# EAGLE board Main Board - Double-Panel (EAGLE 9.6.2), part 1 of 2
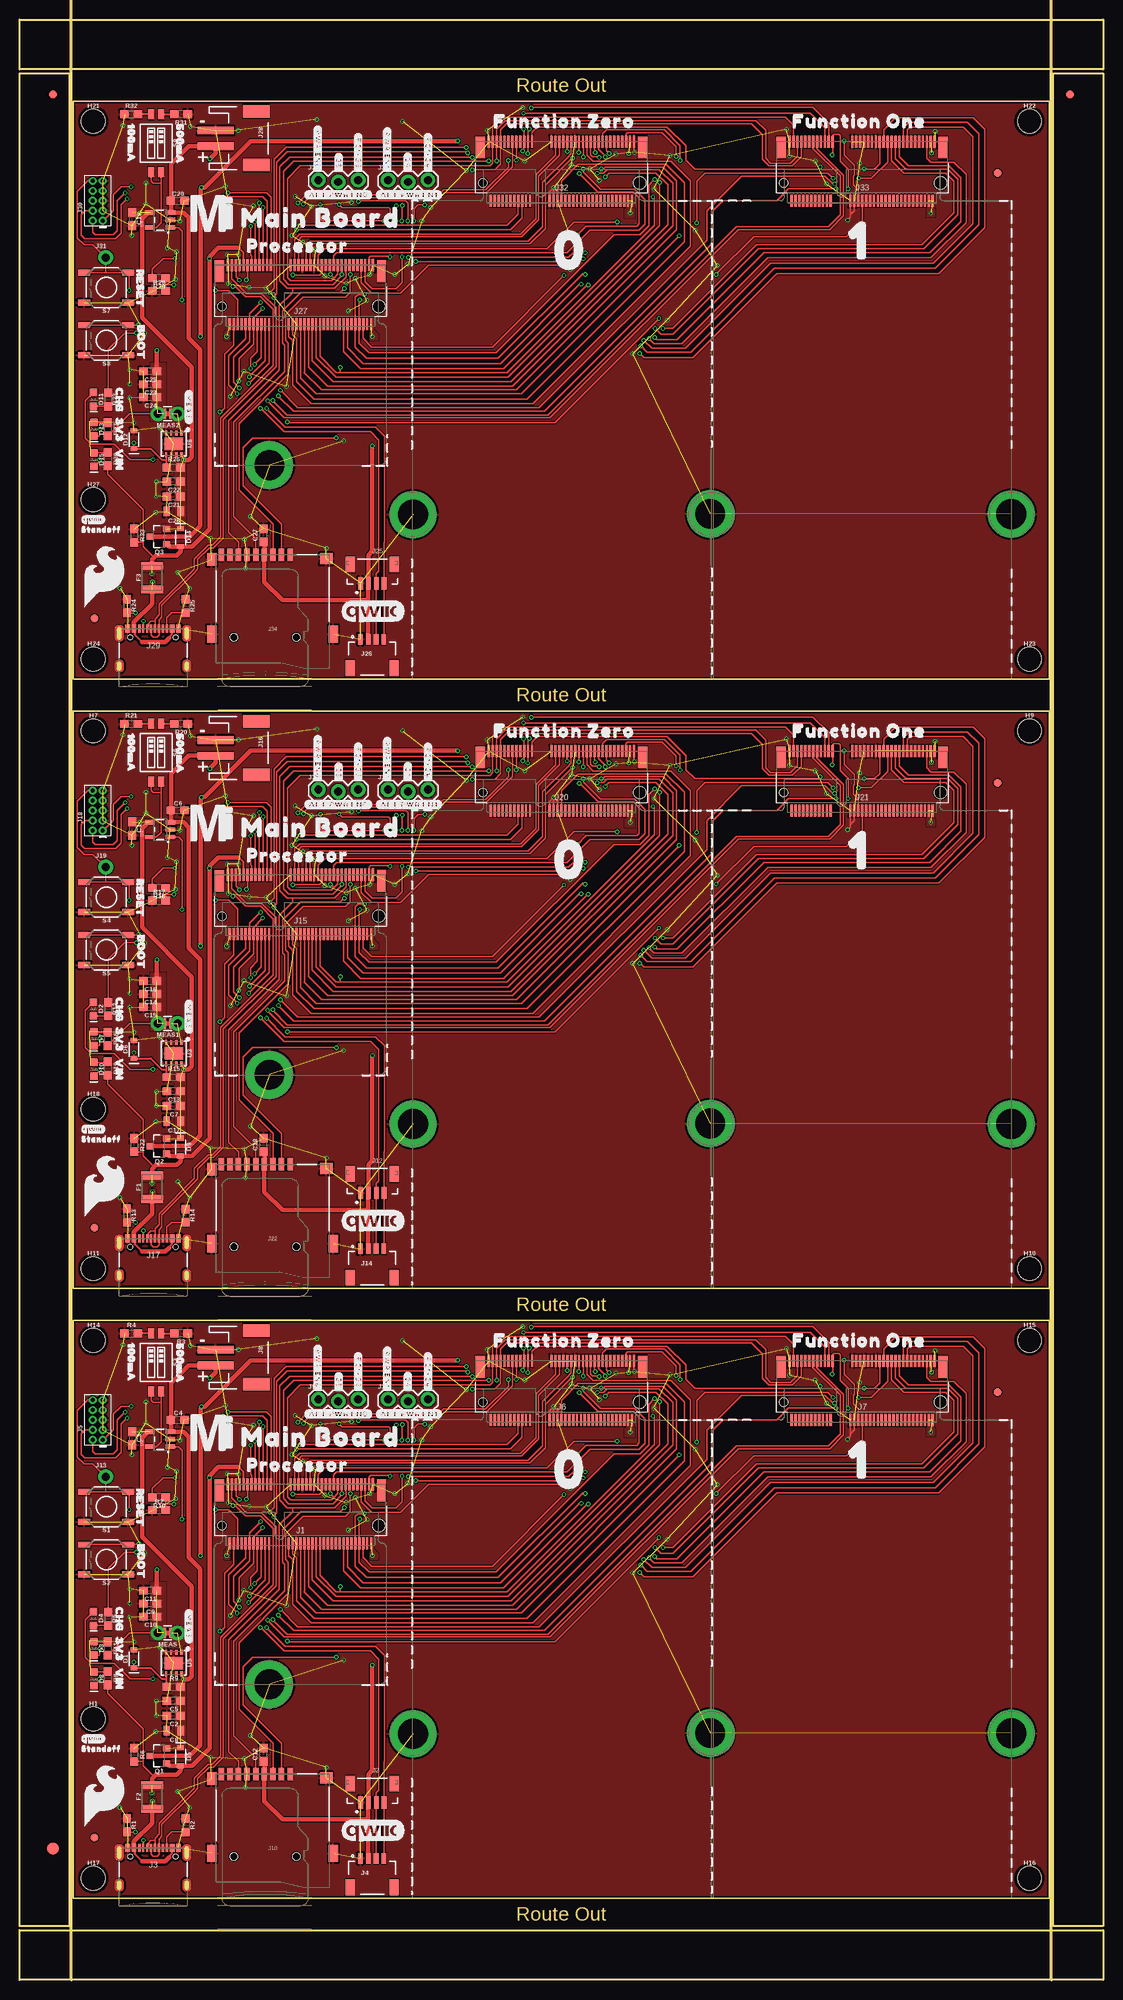
[diagram p0: board, top side]
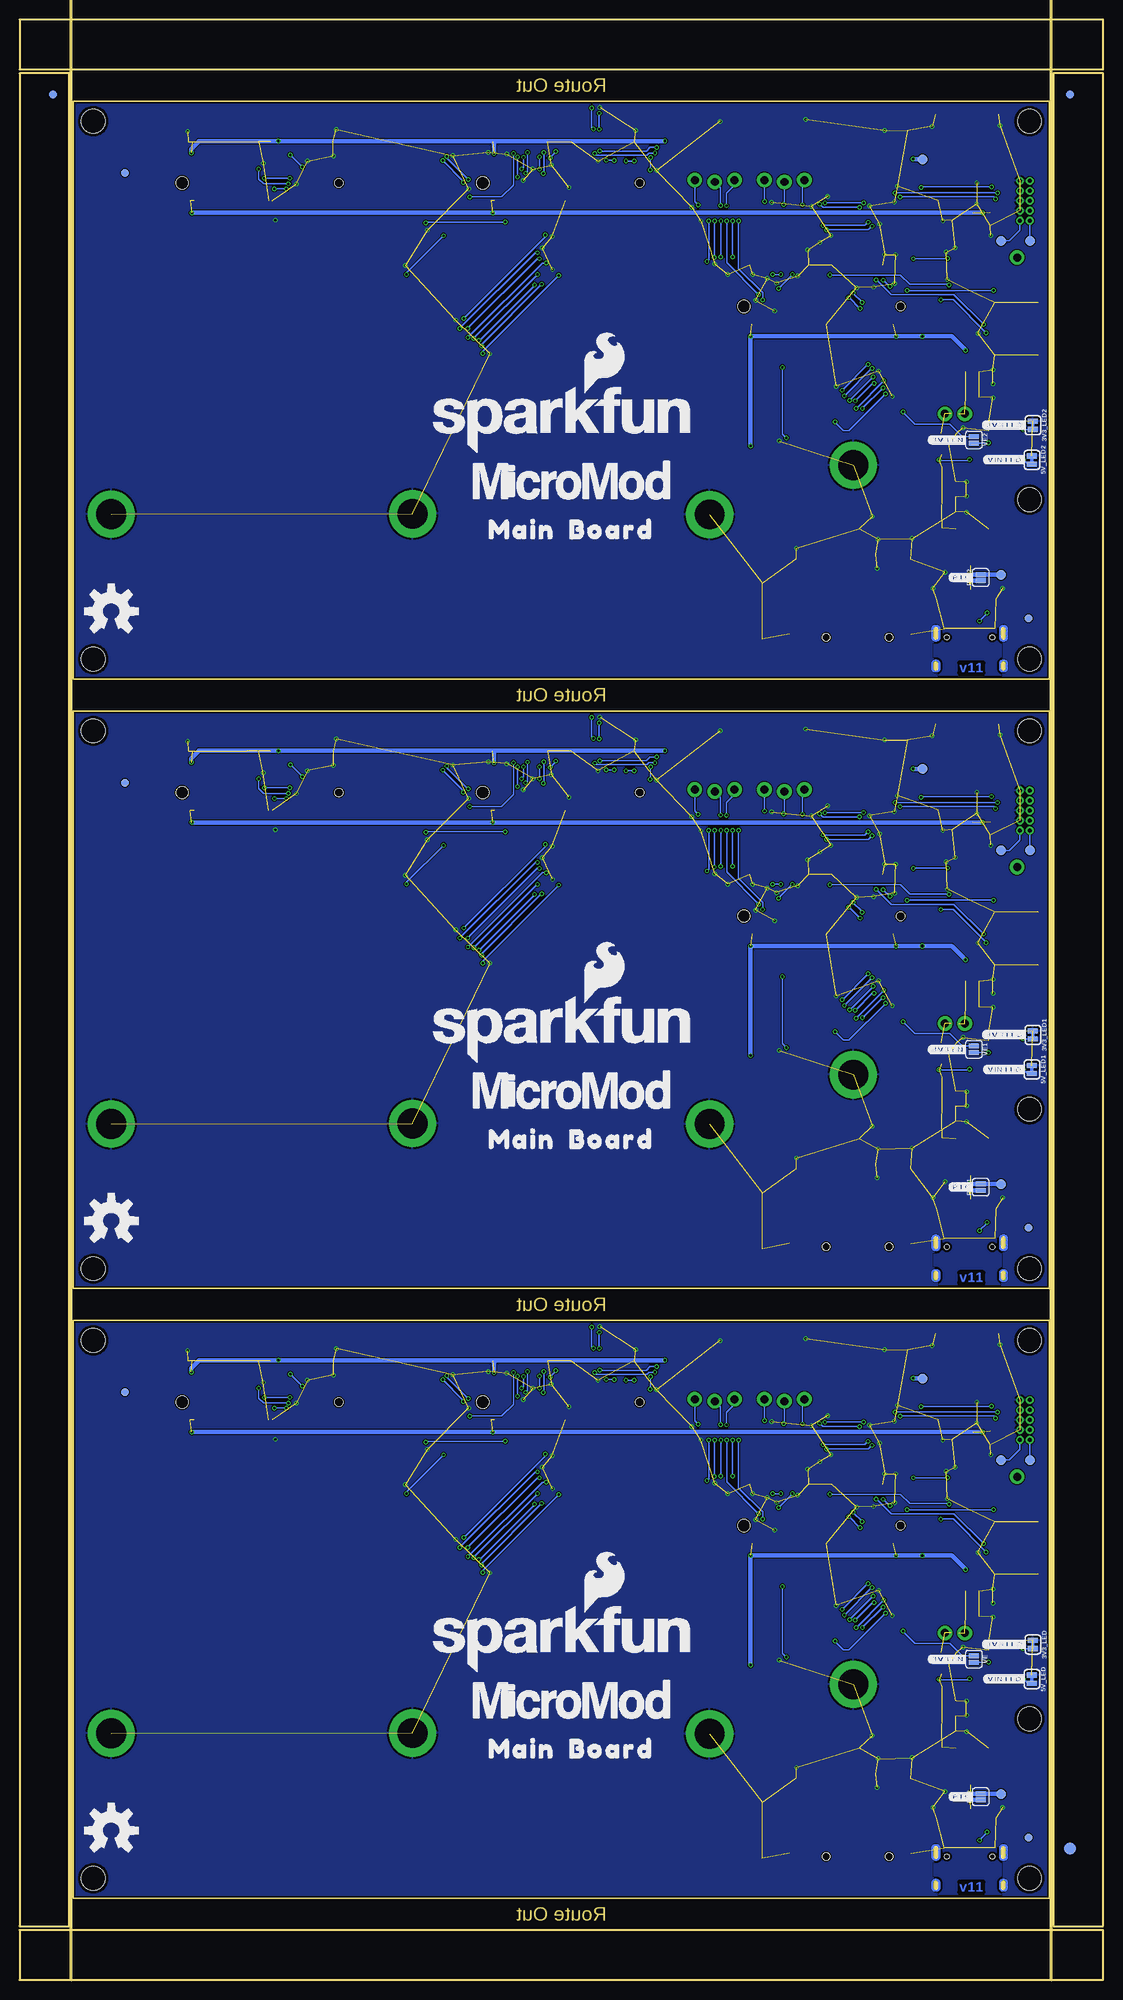
[diagram p1: board, bottom side, seen from below]

Size 138.18 x 249.94 mm. Coordinates in mm from the lower left corner, seen from the top.
Outline: 131.32,10.41 6.86,10.41 6.86,84.07 131.32,84.07 131.32,10.41
Outline: 131.32,88.14 6.86,88.14 6.86,161.8 131.32,161.8 131.32,88.14
Outline: 131.32,165.86 6.86,165.86 6.86,239.52 131.32,239.52 131.32,165.86
Outline: 0,6.35 138.18,6.35 138.18,0 0,0 0,6.35
Outline: 131.83,243.08 138.18,243.08 138.18,6.86 131.83,6.86 131.83,243.08
Outline: 0,249.94 138.18,249.94 138.18,243.59 0,243.59 0,249.94
Outline: 0,243.08 6.35,243.08 6.35,6.86 0,6.86 0,243.08
Copper layers (1*16): Top 0.035mm / dielectric 1.5mm / Bottom 0.035mm
Design rules "Main Board - Double": minimum track width 5mil, minimum drill 0.3mm, track to track 5mil, track to pad 5mil, pad to pad 5mil, via to via 5mil, smd to smd 5mil, copper to edge 7mil, drill to drill 7mil, minimum pad ring 5mil, minimum via ring 5mil, stop-mask expansion 2.5mil, vias tented up to drill 25mil, thermal gap 10mil
Net classes: 0 default: width 0.178 mm, drill 0.305 mm; 1 POWER: width 0.559 mm, drill 0.305 mm; 2 Diff pairs: width 0.203 mm, drill 0.305 mm
tRestrict: area 106.1,71.2 to 106.2,71.6; area 105.6,71.2 to 105.7,71.6; area 68.3,71.2 to 68.4,71.6; area 67.8,71.2 to 67.9,71.6; area 106.1,148.9 to 106.2,149.3; area 105.6,148.9 to 105.7,149.3; area 68.3,148.9 to 68.4,149.3; area 67.8,148.9 to 67.9,149.3; area 106.1,226.6 to 106.2,227; area 105.6,226.6 to 105.7,227; area 68.3,226.6 to 68.4,227; area 67.8,226.6 to 67.9,227
Milling: 2 lines

## Footprints (pad centres in the part's own frame; a part is rotated, then mirrored left to right if it is on the bottom)
SMT-JUMPER_2_NC_TRACE_SILK = smd 0.66 x 1.27: 1 -0.521,0; 2 0.521,0
SMT-JUMPER_2_NO_SILK = smd 0.635 x 1.27: 1 -0.406,0; 2 0.406,0
0603 = smd 1.1 x 1: 1 -0.85,0; 2 0.85,0
0805 = smd 0.8 x 1.2: 1 -0.9,0; 2 0.9,0
SOD-323 = smd 0.63 x 0.83: A 1.15,0; C -1.15,0
LED-0603 = smd 1 x 1: A -0.877,0; C 0.877,0
FIDUCIAL-1X2 = smd 1 x 1: 1 0,0
FIDUCIAL-1.5X3 = smd 1.5 x 1.5: 1 0,0
1210 = smd 1 x 2.8: 1 -1.5,0; 2 1.5,0
STAND-OFF-TIGHT = hole 3.048: 0,0
STAND-OFF-REFLOW-M2.5 = drill 3.8 pad 6: 1 0,0
M.2-CONNECTOR-E = smd 0.3 x 1.55: 1 9.25,-5.275; 2 9,2.275; 3 8.75,-5.275; 4 8.5,2.275; 5 8.25,-5.275; 6 8,2.275; 7 7.75,-5.275; 8 7.5,2.275; 9 7.25,-5.275; 10 7,2.275; 11 6.75,-5.275; 12 6.5,2.275; 13 6.25,-5.275; 14 6,2.275; 15 5.75,-5.275; 16 5.5,2.275; 17 5.25,-5.275; 18 5,2.275; 19 4.75,-5.275; 20 4.5,2.275; 21 4.25,-5.275; 22 4,2.275; 23 3.75,-5.275; 32 1.5,2.275; 33 1.25,-5.275; 34 1,2.275; 35 0.75,-5.275; 36 0.5,2.275; 37 0.25,-5.275; 38 0,2.275; 39 -0.25,-5.275; 40 -0.5,2.275; 41 -0.75,-5.275; 42 -1,2.275; 43 -1.25,-5.275; 44 -1.5,2.275; 45 -1.75,-5.275; 46 -2,2.275; 47 -2.25,-5.275; 48 -2.5,2.275; 49 -2.75,-5.275; 50 -3,2.275; 51 -3.25,-5.275; 52 -3.5,2.275; 53 -3.75,-5.275; 54 -4,2.275; 55 -4.25,-5.275; 56 -4.5,2.275; 57 -4.75,-5.275; 58 -5,2.275; 59 -5.25,-5.275; 60 -5.5,2.275; 61 -5.75,-5.275; 62 -6,2.275; 63 -6.25,-5.275; 64 -6.5,2.275; 65 -6.75,-5.275; 66 -7,2.275; 67 -7.25,-5.275; 68 -7.5,2.275; 69 -7.75,-5.275; 70 -8,2.275; 71 -8.25,-5.275; 72 -8.5,2.275; 73 -8.75,-5.275; 74 -9,2.275; 75 -9.25,-5.275 | smd 1.2 x 2.75: A1 10.35,-4.5; A2 -10.35,-4.5 | hole 1.1: 10,0 | hole 1.6: -10,0
JST04_1MM_VERT = smd 0.6 x 1.55: 1 -1.478,0.775; 2 -0.478,0.775; 3 0.522,0.775; 4 1.522,0.775 | smd 1.2 x 2: NC1 -2.778,3.2; NC2 2.822,3.2
USB-C-16P-2LAYER-PADS = smd 0.3 x 1: A5 -1.25,-0.34; A6 -0.25,-0.34; A7 0.25,-0.34; A8 1.25,-0.34; B5 1.75,-0.34; B6 0.75,-0.34; B7 -0.75,-0.34; B8 -1.75,-0.34 | smd 0.6 x 1: GND -3.225,-0.34; GND2 3.225,-0.34; VBUS1 -2.45,-0.34; VBUS2 2.45,-0.34 | drill 0.4 pad 0.6 long: SHLD1 -4.318,-0.915; SHLD2 4.318,-0.915; SHLD3 -4.318,-5.095; SHLD4 4.318,-5.095 | hole 0.65: -2.89,-1.445; 2.89,-1.445
JST04_1MM_RA = smd 0.6 x 1.35: 1 -1.5,0; 2 -0.5,0; 3 0.5,0; 4 1.5,0 | smd 1.2 x 2: NC1 2.8,-3.675; NC2 -2.8,-3.675
2X5-PTH-1.27MM = drill 0.508 pad 1: 1 -2.54,-0.635; 2 -2.54,0.635; 3 -1.27,-0.635; 4 -1.27,0.635; 5 0,-0.635; 6 0,0.635; 7 1.27,-0.635; 8 1.27,0.635; 9 2.54,-0.635; 10 2.54,0.635
M.2-CONNECTOR-E-FUNCTION-STANDARD = smd 0.3 x 1.55: 1 9.25,-5.275; 2 9,2.275; 3 8.75,-5.275; 4 8.5,2.275; 5 8.25,-5.275; 6 8,2.275; 7 7.75,-5.275; 8 7.5,2.275; 9 7.25,-5.275; 10 7,2.275; 11 6.75,-5.275; 12 6.5,2.275; 13 6.25,-5.275; 14 6,2.275; 15 5.75,-5.275; 16 5.5,2.275; 17 5.25,-5.275; 18 5,2.275; 19 4.75,-5.275; 20 4.5,2.275; 21 4.25,-5.275; 22 4,2.275; 23 3.75,-5.275; 32 1.5,2.275; 33 1.25,-5.275; 34 1,2.275; 35 0.75,-5.275; 36 0.5,2.275; 37 0.25,-5.275; 38 0,2.275; 39 -0.25,-5.275; 40 -0.5,2.275; 41 -0.75,-5.275; 42 -1,2.275; 43 -1.25,-5.275; 44 -1.5,2.275; 45 -1.75,-5.275; 46 -2,2.275; 47 -2.25,-5.275; 48 -2.5,2.275; 49 -2.75,-5.275; 50 -3,2.275; 51 -3.25,-5.275; 52 -3.5,2.275; 53 -3.75,-5.275; 54 -4,2.275; 55 -4.25,-5.275; 56 -4.5,2.275; 57 -4.75,-5.275; 58 -5,2.275; 59 -5.25,-5.275; 60 -5.5,2.275; 61 -5.75,-5.275; 62 -6,2.275; 63 -6.25,-5.275; 64 -6.5,2.275; 65 -6.75,-5.275; 66 -7,2.275; 67 -7.25,-5.275; 68 -7.5,2.275; 69 -7.75,-5.275; 70 -8,2.275; 71 -8.25,-5.275; 72 -8.5,2.275; 73 -8.75,-5.275; 74 -9,2.275; 75 -9.25,-5.275 | smd 1.2 x 2.75: A1 10.35,-4.5; A2 -10.35,-4.5 | hole 1.1: 10,0 | hole 1.6: -10,0
JST-2-SMD = smd 1 x 4.6: 1 -1,-3.7; 2 1,-3.7 | smd 1.6 x 3.4: NC1 -3.4,1.5; NC2 3.4,1.5
1X03_LOCK = drill 1.016 pad 1.88: 1 0,0.127; 2 2.54,-0.127; 3 5.08,0.127
MICROSD-EXTERNALPIN = smd 0.7 x 1.6: 1 2.25,10.5; 2 1.15,10.5; 3 0.05,10.5; 4 -1.05,10.5; 5 -2.15,10.5; 6 -3.25,10.5; 7 -4.35,10.5; 8 -5.45,10.5; 9 -6.55,10.5 | smd 1.2 x 1.6: 10 -7.75,9.9 | smd 1.2 x 2.2: 11 -7.75,0.4; 12 7.75,0.4 | smd 1.6 x 1.4: 13 6.85,10 | hole 1: 3.05,0; -4.95,0
1X01_NO_SILK = drill 1.016 pad 1.88: 1 0,0
COMBO-JUMPER_2_NC_TRACE = smd 0.635 x 1.27: 1 -0.508,0; 2 0.508,0 | drill 1.016 pad 1.88: 3 -1.27,0; 4 1.27,0
SOT23-3 = smd 0.8 x 0.9: 1 -0.95,-1; 2 0.95,-1; 3 0,1.1
TACTILE_SWITCH_SMD_5.2MM = smd 1.524 x 0.762: 1 -2.794,1.905; 2 2.794,1.905; 3 -2.794,-1.905; 4 2.794,-1.905
DIPSWITCH-02-50MIL = smd 0.762 x 1.27: 1 -0.635,-3.7; 2 0.635,-3.7; 3 0.635,3.7; 4 -0.635,3.7
PAD.03X.05 = smd 1.27 x 1.27: 1 0,0
SOT23-5 = smd 0.55 x 1.2: 1 -0.95,-1.3; 2 0,-1.3; 3 0.95,-1.3; 4 0.95,1.3; 5 -0.95,1.3
UDFN-8 = smd 0.3 x 0.65: 1 -0.975,-1.375; 2 -0.325,-1.375; 3 0.325,-1.375; 4 0.975,-1.375; 5 0.975,1.375; 6 0.325,1.375; 7 -0.325,1.375; 8 -0.975,1.375 | smd 2.35 x 1.6: EP 0,0

## Placement (x,y rotation side)
3V3_LED  [SMT-JUMPER_2_NC_TRACE_SILK]  8.94,42.76 270 bottom
3V3_LED1  [SMT-JUMPER_2_NC_TRACE_SILK]  8.94,120.48 270 bottom
3V3_LED2  [SMT-JUMPER_2_NC_TRACE_SILK]  8.94,198.21 270 bottom
5V_LED  [SMT-JUMPER_2_NC_TRACE_SILK]  9.07,38.35 270 bottom
5V_LED1  [SMT-JUMPER_2_NC_TRACE_SILK]  9.07,116.07 270 bottom
5V_LED2  [SMT-JUMPER_2_NC_TRACE_SILK]  9.07,193.8 270 bottom
BYP  JUMPER-SMT_2_NO_SILK  [SMT-JUMPER_2_NO_SILK]  15.62,23.34 90 bottom
BYP1  JUMPER-SMT_2_NO_SILK  [SMT-JUMPER_2_NO_SILK]  15.62,101.07 90 bottom
BYP2  JUMPER-SMT_2_NO_SILK  [SMT-JUMPER_2_NO_SILK]  15.62,178.79 90 bottom
C1  4.7uF  [0603]  14.38,146.79 270 top
C2  0.22uF  [0603]  19.66,33.68 180 top
C3  4.7uF  [0603]  14.38,69.06 270 top
C4  4.7uF  [0603]  20.17,71.4 0 top
C5  0.1uF  [0603]  19.66,35.59 180 top
C6  4.7uF  [0603]  20.17,149.12 0 top
C7  0.22uF  [0603]  19.66,111.4 180 top
C8  10uF  [0805]  19.66,31.78 180 top
C9  1.0uF  [0603]  16.66,47.98 180 top
C10  0.1uF  [0603]  16.66,46.33 180 top
C11  0.22uF  [0603]  16.66,49.63 180 top
C12  0.1uF  [0603]  31.12,28.73 90 top
C13  0.1uF  [0603]  19.66,113.31 180 top
C14  1.0uF  [0603]  16.66,125.7 180 top
C15  0.1uF  [0603]  16.66,124.05 180 top
C16  0.22uF  [0603]  16.66,127.36 180 top
C17  10uF  [0805]  19.66,109.5 180 top
C18  0.1uF  [0603]  31.12,106.45 90 top
C19  4.7uF  [0603]  14.38,224.51 270 top
C20  4.7uF  [0603]  20.17,226.85 0 top
C21  0.22uF  [0603]  19.66,189.13 180 top
C22  0.1uF  [0603]  19.66,191.03 180 top
C23  1.0uF  [0603]  16.66,203.43 180 top
C24  0.1uF  [0603]  16.66,201.78 180 top
C25  0.22uF  [0603]  16.66,205.08 180 top
C26  10uF  [0805]  19.66,187.22 180 top
C27  0.1uF  [0603]  31.12,184.18 90 top
D1  3.3V  [SOD-323]  14.58,40.92 90 top
D2  Yellow  [LED-0603]  9.45,123.8 270 top
D3  RED  [LED-0603]  9.5,42.28 270 top
D4  Yellow  [LED-0603]  9.45,46.07 270 top
D5  3A/10V/280mV  [SOD-323]  20.52,28.47 270 top
D6  3.3V  [SOD-323]  14.58,118.64 90 top
D7  RED  [LED-0603]  9.5,120 270 top
D8  RED  [LED-0603]  9.5,38.38 270 top
D9  3A/10V/280mV  [SOD-323]  20.52,106.2 270 top
D10  RED  [LED-0603]  9.5,116.1 270 top
D11  Yellow  [LED-0603]  9.45,201.52 270 top
D12  3.3V  [SOD-323]  14.58,196.37 90 top
D13  RED  [LED-0603]  9.5,197.73 270 top
D14  3A/10V/280mV  [SOD-323]  20.52,183.92 270 top
D15  RED  [LED-0603]  9.5,193.82 270 top
E$1  [FIDUCIAL-1X2]  4.23,240.41 0 top
E$2  [FIDUCIAL-1X2]  4.23,240.41 0 bottom
E$3  [FIDUCIAL-1X2]  133.94,240.41 0 top
E$4  [FIDUCIAL-1X2]  133.94,240.41 0 bottom
E$5  [FIDUCIAL-1.5X3]  4.23,16.76 0 top
E$6  [FIDUCIAL-1.5X3]  4.23,16.76 0 bottom
F1  6V/2A  [1210]  16.89,101.07 90 top
F2  6V/2A  [1210]  16.89,23.34 90 top
F3  6V/2A  [1210]  16.89,178.79 90 top
FD1  FIDUCIAL1X2  [FIDUCIAL-1X2]  124.71,74.93 0 bottom
FD2  FIDUCIAL1X2  [FIDUCIAL-1X2]  124.71,74.93 0 top
FD3  FIDUCIAL1X2  [FIDUCIAL-1X2]  9.52,18.16 90 top
FD4  FIDUCIAL1X2  [FIDUCIAL-1X2]  9.52,18.16 270 bottom
FD5  FIDUCIAL1X2  [FIDUCIAL-1X2]  124.71,152.65 0 bottom
FD6  FIDUCIAL1X2  [FIDUCIAL-1X2]  124.71,152.65 0 top
FD7  FIDUCIAL1X2  [FIDUCIAL-1X2]  9.52,95.89 90 top
FD8  FIDUCIAL1X2  [FIDUCIAL-1X2]  9.52,95.89 270 bottom
FD9  FIDUCIAL1X2  [FIDUCIAL-1X2]  124.71,230.38 0 bottom
FD10  FIDUCIAL1X2  [FIDUCIAL-1X2]  124.71,230.38 0 top
FD11  FIDUCIAL1X2  [FIDUCIAL-1X2]  9.52,173.61 90 top
FD12  FIDUCIAL1X2  [FIDUCIAL-1X2]  9.52,173.61 270 bottom
H1  STAND-OFFTIGHT  [STAND-OFF-TIGHT]  9.4,33.27 0 top
H2  STAND-OFF-REFLOW-M2.5_2.5MM_TALL  [STAND-OFF-REFLOW-M2.5]  88.08,31.47 0 top
H3  STAND-OFF-REFLOW-M2.5_2.5MM_TALL  [STAND-OFF-REFLOW-M2.5]  126.48,31.42 270 top
H4  STAND-OFF-REFLOW-M2.5_2.5MM_TALL  [STAND-OFF-REFLOW-M2.5]  50.18,31.39 270 top
H5  STAND-OFF-REFLOW-M2.5_2.5MM_TALL  [STAND-OFF-REFLOW-M2.5]  126.48,109.14 270 top
H6  STAND-OFF-REFLOW-M2.5_2.5MM_TALL  [STAND-OFF-REFLOW-M2.5]  31.86,115.41 270 top
H7  STAND-OFFTIGHT  [STAND-OFF-TIGHT]  9.4,159.26 0 top
H8  STAND-OFF-REFLOW-M2.5_2.5MM_TALL  [STAND-OFF-REFLOW-M2.5]  31.86,37.69 270 top
H9  STAND-OFFTIGHT  [STAND-OFF-TIGHT]  128.78,159.26 0 top
H10  STAND-OFFTIGHT  [STAND-OFF-TIGHT]  128.78,90.68 0 top
H11  STAND-OFFTIGHT  [STAND-OFF-TIGHT]  9.4,90.68 0 top
H12  STAND-OFF-REFLOW-M2.5_2.5MM_TALL  [STAND-OFF-REFLOW-M2.5]  88.08,109.19 0 top
H13  STAND-OFF-REFLOW-M2.5_2.5MM_TALL  [STAND-OFF-REFLOW-M2.5]  50.18,109.12 270 top
H14  STAND-OFFTIGHT  [STAND-OFF-TIGHT]  9.4,81.53 0 top
H15  STAND-OFFTIGHT  [STAND-OFF-TIGHT]  128.78,81.53 0 top
H16  STAND-OFFTIGHT  [STAND-OFF-TIGHT]  128.78,12.95 0 top
H17  STAND-OFFTIGHT  [STAND-OFF-TIGHT]  9.4,12.95 0 top
H18  STAND-OFFTIGHT  [STAND-OFF-TIGHT]  9.4,111 0 top
H19  STAND-OFF-REFLOW-M2.5_2.5MM_TALL  [STAND-OFF-REFLOW-M2.5]  126.48,186.87 270 top
H20  STAND-OFF-REFLOW-M2.5_2.5MM_TALL  [STAND-OFF-REFLOW-M2.5]  31.86,193.14 270 top
H21  STAND-OFFTIGHT  [STAND-OFF-TIGHT]  9.4,236.98 0 top
H22  STAND-OFFTIGHT  [STAND-OFF-TIGHT]  128.78,236.98 0 top
H23  STAND-OFFTIGHT  [STAND-OFF-TIGHT]  128.78,168.4 0 top
H24  STAND-OFFTIGHT  [STAND-OFF-TIGHT]  9.4,168.4 0 top
H25  STAND-OFF-REFLOW-M2.5_2.5MM_TALL  [STAND-OFF-REFLOW-M2.5]  88.08,186.92 0 top
H26  STAND-OFF-REFLOW-M2.5_2.5MM_TALL  [STAND-OFF-REFLOW-M2.5]  50.18,186.84 270 top
H27  STAND-OFFTIGHT  [STAND-OFF-TIGHT]  9.4,188.72 0 top
J1  MICROMOD-2222-C  [M.2-CONNECTOR-E]  35.81,57.91 180 top
J2  Vertical Qwiic Connector  [JST04_1MM_VERT]  44.96,21.84 0 top
J3  [USB-C-16P-2LAYER-PADS]  17.02,17.17 0 top
J4  QWIIC_RIGHT_ANGLE  [JST04_1MM_RA]  44.96,15.49 0 top
J5  CORTEX_JTAG_DEBUG_MINIMUM_PTH  [2X5-PTH-1.27MM]  9.97,71.38 90 top
J6  MICROMOD_CARRIER  [M.2-CONNECTOR-E-FUNCTION-STANDARD]  69.09,73.66 180 top
J7  MICROMOD_CARRIER  [M.2-CONNECTOR-E-FUNCTION-STANDARD]  107.44,73.66 180 top
J8  [JST-2-SMD]  28.68,79.35 270 top
J9  [1X03_LOCK]  38.1,73.91 0 top
J10  MICRO-SD-PUSH-PUSH-EXT-PIN  [MICROSD-EXTERNALPIN]  32.26,15.75 0 top
J11  [1X03_LOCK]  46.99,73.91 0 top
J12  Vertical Qwiic Connector  [JST04_1MM_VERT]  44.96,99.57 0 top
J13  [1X01_NO_SILK]  10.97,64.16 0 top
J14  QWIIC_RIGHT_ANGLE  [JST04_1MM_RA]  44.96,93.22 0 top
J15  MICROMOD-2222-C  [M.2-CONNECTOR-E]  35.81,135.64 180 top
J16  [JST-2-SMD]  28.68,157.07 270 top
J17  [USB-C-16P-2LAYER-PADS]  17.02,94.89 0 top
J18  CORTEX_JTAG_DEBUG_MINIMUM_PTH  [2X5-PTH-1.27MM]  9.97,149.1 90 top
J19  [1X01_NO_SILK]  10.97,141.88 0 top
J20  MICROMOD_CARRIER  [M.2-CONNECTOR-E-FUNCTION-STANDARD]  69.09,151.38 180 top
J21  MICROMOD_CARRIER  [M.2-CONNECTOR-E-FUNCTION-STANDARD]  107.44,151.38 180 top
J22  MICRO-SD-PUSH-PUSH-EXT-PIN  [MICROSD-EXTERNALPIN]  32.26,93.47 0 top
J23  [1X03_LOCK]  38.1,151.64 0 top
J24  [1X03_LOCK]  46.99,151.64 0 top
J25  Vertical Qwiic Connector  [JST04_1MM_VERT]  44.96,177.29 0 top
J26  QWIIC_RIGHT_ANGLE  [JST04_1MM_RA]  44.96,170.94 0 top
J27  MICROMOD-2222-C  [M.2-CONNECTOR-E]  35.81,213.36 180 top
J28  [JST-2-SMD]  28.68,234.8 270 top
J29  [USB-C-16P-2LAYER-PADS]  17.02,172.62 0 top
J30  CORTEX_JTAG_DEBUG_MINIMUM_PTH  [2X5-PTH-1.27MM]  9.97,226.83 90 top
J31  [1X01_NO_SILK]  10.97,219.61 0 top
J32  MICROMOD_CARRIER  [M.2-CONNECTOR-E-FUNCTION-STANDARD]  69.09,229.11 180 top
J33  MICROMOD_CARRIER  [M.2-CONNECTOR-E-FUNCTION-STANDARD]  107.44,229.11 180 top
J34  MICRO-SD-PUSH-PUSH-EXT-PIN  [MICROSD-EXTERNALPIN]  32.26,171.2 0 top
J35  [1X03_LOCK]  38.1,229.36 0 top
J36  [1X03_LOCK]  46.99,229.36 0 top
LOGO1  QWIIC_LOGO_8MM  [QWIIC_8MM]  45.08,19.05 0 top
LOGO2  SFE_LOGO_NAME_FLAME.3_INCH  [SFE_LOGO_NAME_FLAME_.3]  69.09,43.43 0 bottom
LOGO3  OSHW-LOGOL  [OSHW-LOGO-L]  126.49,19.05 0 bottom
LOGO4  QWIIC_LOGO_8MM  [QWIIC_8MM]  45.08,96.77 0 top
LOGO5  SFE_LOGO_NAME_FLAME.3_INCH  [SFE_LOGO_NAME_FLAME_.3]  69.09,121.16 0 bottom
LOGO6  OSHW-LOGOL  [OSHW-LOGO-L]  126.49,96.77 0 bottom
LOGO7  QWIIC_LOGO_8MM  [QWIIC_8MM]  45.08,174.5 0 top
LOGO8  SFE_LOGO_NAME_FLAME.3_INCH  [SFE_LOGO_NAME_FLAME_.3]  69.09,198.88 0 bottom
LOGO9  OSHW-LOGOL  [OSHW-LOGO-L]  126.49,174.5 0 bottom
MEAS  JUMPER-COMBO_2_NC_TRACE  [COMBO-JUMPER_2_NC_TRACE]  18.9,44.22 180 top
MEAS1  JUMPER-COMBO_2_NC_TRACE  [COMBO-JUMPER_2_NC_TRACE]  18.9,121.95 180 top
MEAS2  JUMPER-COMBO_2_NC_TRACE  [COMBO-JUMPER_2_NC_TRACE]  18.9,199.67 180 top
Q1  3.1A/30V/105mΩ  [SOT23-3]  17.78,28.58 90 top
Q2  3.1A/30V/105mΩ  [SOT23-3]  17.78,106.3 90 top
Q3  3.1A/30V/105mΩ  [SOT23-3]  17.78,184.02 90 top
R1  5.1k  [0603]  13.69,19.74 270 top
R2  5.1k  [0603]  21.18,19.71 270 top
R3  2.0k  [0603]  20.57,82.42 180 top
R4  10k  [0603]  14.22,82.42 0 top
R5  1k  [0603]  11.3,46.04 270 top
R6  10k  [0603]  14.61,28.7 270 top
R7  10k  [0603]  17.78,59.89 0 top
R8  4.7k  [0603]  11.23,38.47 270 top
R9  100k  [0603]  19.66,37.36 0 top
R10  20k  [0603]  17.78,61.52 180 top
R11  1k  [0603]  11.23,42.25 270 top
R12  1k  [0603]  11.3,123.77 270 top
R13  5.1k  [0603]  13.69,97.46 270 top
R14  5.1k  [0603]  21.18,97.43 270 top
R15  100k  [0603]  19.66,115.09 0 top
R16  1k  [0603]  11.23,119.98 270 top
R17  10k  [0603]  17.78,137.62 0 top
R18  20k  [0603]  17.78,139.24 180 top
R19  4.7k  [0603]  11.23,116.2 270 top
R20  2.0k  [0603]  20.57,160.15 180 top
R21  10k  [0603]  14.22,160.15 0 top
R22  10k  [0603]  14.61,106.43 270 top
R23  1k  [0603]  11.3,201.49 270 top
R24  5.1k  [0603]  13.69,175.18 270 top
R25  5.1k  [0603]  21.18,175.16 270 top
R26  100k  [0603]  19.66,192.81 0 top
R27  1k  [0603]  11.23,197.7 270 top
R28  10k  [0603]  17.78,215.34 0 top
R29  20k  [0603]  17.78,216.97 180 top
R30  4.7k  [0603]  11.23,193.92 270 top
R31  2.0k  [0603]  20.57,237.87 180 top
R32  10k  [0603]  14.22,237.87 0 top
R33  10k  [0603]  14.61,184.15 270 top
S1  Reset  [TACTILE_SWITCH_SMD_5.2MM]  11.05,60.33 180 top
S2  BOOT  [TACTILE_SWITCH_SMD_5.2MM]  11.05,53.59 180 top
S3  DIP-02-SMD-50MIL  [DIPSWITCH-02-50MIL]  17.4,78.74 180 top
S4  Reset  [TACTILE_SWITCH_SMD_5.2MM]  11.05,138.05 180 top
S5  BOOT  [TACTILE_SWITCH_SMD_5.2MM]  11.05,131.32 180 top
S6  DIP-02-SMD-50MIL  [DIPSWITCH-02-50MIL]  17.4,156.46 180 top
S7  Reset  [TACTILE_SWITCH_SMD_5.2MM]  11.05,215.77 180 top
S8  BOOT  [TACTILE_SWITCH_SMD_5.2MM]  11.05,209.04 180 top
S9  DIP-02-SMD-50MIL  [DIPSWITCH-02-50MIL]  17.4,234.19 180 top
TP1  TEST-POINT3X5  [PAD.03X.05]  9.3,66.27 0 bottom
TP2  TEST-POINT3X5  [PAD.03X.05]  13.03,66.28 180 bottom
TP3  TEST-POINT3X5  [PAD.03X.05]  23.04,76.68 270 bottom
TP4  TEST-POINT3X5  [PAD.03X.05]  13.03,23.72 0 bottom
TP5  TEST-POINT3X5  [PAD.03X.05]  13.03,144.01 180 bottom
TP6  TEST-POINT3X5  [PAD.03X.05]  23.04,154.41 270 bottom
TP7  TEST-POINT3X5  [PAD.03X.05]  13.03,101.45 0 bottom
TP8  TEST-POINT3X5  [PAD.03X.05]  9.3,144 0 bottom
TP9  TEST-POINT3X5  [PAD.03X.05]  13.03,221.73 180 bottom
TP10  TEST-POINT3X5  [PAD.03X.05]  23.04,232.13 270 bottom
TP11  TEST-POINT3X5  [PAD.03X.05]  13.03,179.17 0 bottom
TP12  TEST-POINT3X5  [PAD.03X.05]  9.3,221.72 0 bottom
U1  MCP73831  [SOT23-5]  17.93,146.66 90 top
U2  MCP73831  [SOT23-5]  17.93,68.94 90 top
U3  AP7361C-33  [UDFN-8]  19.66,118.14 180 top
U4  MCP73831  [SOT23-5]  17.93,224.38 90 top
U5  AP7361C-33  [UDFN-8]  19.66,40.41 180 top
U6  AP7361C-33  [UDFN-8]  19.66,195.86 180 top
U$1  [#3V3_EN#18]  19.81,40.89 0 bottom
U$2  [#3V3_LED#17]  12.57,42.8 0 bottom
U$3  [#VIN_LED#16]  12.57,38.35 0 bottom
U$4  [3V332533]  12.7,42.16 270 top
U$5  [VIN32532]  12.7,38.35 270 top
U$6  [CHG32531]  12.7,45.97 270 top
U$7  [#PTC#18]  18.03,23.37 0 bottom
U$8  [BOOT32541]  15.49,53.34 270 top
U$9  [RESET32540]  15.37,60.2 270 top
U$10  [PROCESSOR525]  35.43,65.66 0 top
U$11  [FUNCTION_ZERO520]  69.47,81.53 0 top
U$12  [FUNCTION_ONE524]  107.06,81.53 0 top
U$13  [MAIN523]  74.17,29.46 0 bottom
U$14  [MICROMOD_MI_LOGO_1]  24.51,69.8 0 top
U$15  [0523]  70.36,65.02 0 top
U$16  [1524]  107.19,66.29 0 top
U$17  [MICROMOD_LOGO_1]  67.82,35.81 0 bottom
U$18  [BOARD524]  62.74,29.46 0 bottom
U$19  [100MA6]  14.22,78.74 270 top
U$20  [500MA101]  20.45,78.61 270 top
U$21  [MAIN_BOARD5523]  38.35,69.22 0 top
U$22  [QWIIC_3MM]  9.4,30.73 0 top
U$23  [STANDOFF501]  10.41,29.46 0 top
U$24  [SFE_LOGO_FLAME_.3]  10.85,23.44 0 top
U$25  [#ALT_PWR_EN0#510]  40.64,72.14 0 top
U$26  [#ALT_PWR_EN1#510]  49.66,72.14 0 top
U$27  [#FC1#G3#518]  43.18,77.47 270 top
U$28  [#FC1#G4#518]  52.07,77.47 270 top
U$29  [#G6#517]  49.5,76.25 270 top
U$30  [#PWR_EN0#517]  38.02,77.93 270 top
U$31  [#PWR_EN1#517]  46.89,77.8 270 top
U$32  [#G5#517]  40.69,76.2 270 top
U$33  [#MEAS#40313513]  21.59,45.09 270 top
U$34  [#3V3_EN#18]  19.81,118.62 0 bottom
U$35  [#3V3_LED#17]  12.57,120.52 0 bottom
U$36  [#VIN_LED#16]  12.57,116.08 0 bottom
U$37  [3V332533]  12.7,119.89 270 top
U$38  [VIN32532]  12.7,116.08 270 top
U$39  [CHG32531]  12.7,123.7 270 top
U$40  [#PTC#18]  18.03,101.09 0 bottom
U$41  [BOOT32541]  15.49,131.06 270 top
U$42  [RESET32540]  15.37,137.92 270 top
U$43  [PROCESSOR525]  35.43,143.38 0 top
U$44  [FUNCTION_ZERO520]  69.47,159.26 0 top
U$45  [FUNCTION_ONE524]  107.06,159.26 0 top
U$46  [MICROMOD_MI_LOGO_1]  24.51,147.52 0 top
U$47  [0523]  70.36,142.75 0 top
U$48  [1524]  107.19,144.02 0 top
U$49  [MAIN523]  74.17,107.19 0 bottom
U$50  [BOARD524]  62.74,107.19 0 bottom
U$51  [100MA6]  14.22,156.46 270 top
U$52  [500MA101]  20.45,156.34 270 top
U$53  [MAIN_BOARD5523]  38.35,146.94 0 top
U$54  [MICROMOD_LOGO_1]  67.82,113.54 0 bottom
U$55  [QWIIC_3MM]  9.4,108.46 0 top
U$56  [STANDOFF501]  10.41,107.19 0 top
U$57  [SFE_LOGO_FLAME_.3]  10.85,101.17 0 top
U$58  [#G6#517]  49.5,153.97 270 top
U$59  [#PWR_EN0#517]  38.02,155.65 270 top
U$60  [#PWR_EN1#517]  46.89,155.52 270 top
U$61  [#G5#517]  40.69,153.92 270 top
U$62  [#ALT_PWR_EN0#510]  40.64,149.86 0 top
U$63  [#ALT_PWR_EN1#510]  49.66,149.86 0 top
U$64  [#FC1#G3#518]  43.18,155.19 270 top
U$65  [#FC1#G4#518]  52.07,155.19 270 top
U$66  [#MEAS#40313513]  21.59,122.81 270 top
U$67  [#3V3_EN#18]  19.81,196.34 0 bottom
U$68  [#3V3_LED#17]  12.57,198.25 0 bottom
U$69  [#VIN_LED#16]  12.57,193.8 0 bottom
U$70  [3V332533]  12.7,197.61 270 top
U$71  [VIN32532]  12.7,193.8 270 top
U$72  [CHG32531]  12.7,201.42 270 top
U$73  [#PTC#18]  18.03,178.82 0 bottom
U$74  [BOOT32541]  15.49,208.79 270 top
U$75  [RESET32540]  15.37,215.65 270 top
U$76  [PROCESSOR525]  35.43,221.11 0 top
U$77  [FUNCTION_ZERO520]  69.47,236.98 0 top
U$78  [FUNCTION_ONE524]  107.06,236.98 0 top
U$79  [MICROMOD_MI_LOGO_1]  24.51,225.25 0 top
U$80  [0523]  70.36,220.47 0 top
U$81  [1524]  107.19,221.74 0 top
U$82  [MAIN523]  74.17,184.91 0 bottom
U$83  [BOARD524]  62.74,184.91 0 bottom
U$84  [100MA6]  14.22,234.19 270 top
U$85  [500MA101]  20.45,234.06 270 top
U$86  [MAIN_BOARD5523]  38.35,224.66 0 top
U$87  [MICROMOD_LOGO_1]  67.82,191.26 0 bottom
U$88  [QWIIC_3MM]  9.4,186.18 0 top
U$89  [STANDOFF501]  10.41,184.91 0 top
U$90  [SFE_LOGO_FLAME_.3]  10.85,178.89 0 top
U$91  [#G6#517]  49.5,231.7 270 top
U$92  [#PWR_EN0#517]  38.02,233.38 270 top
U$93  [#PWR_EN1#517]  46.89,233.25 270 top
U$94  [#G5#517]  40.69,231.65 270 top
U$95  [#ALT_PWR_EN0#510]  40.64,227.58 0 top
U$96  [#ALT_PWR_EN1#510]  49.66,227.58 0 top
U$97  [#FC1#G3#518]  43.18,232.92 270 top
U$98  [#FC1#G4#518]  52.07,232.92 270 top
U$99  [#MEAS#40313513]  21.59,200.53 270 top
VE  [SMT-JUMPER_2_NO_SILK]  16.48,40.92 270 bottom
VE1  [SMT-JUMPER_2_NO_SILK]  16.48,118.64 270 bottom
VE2  [SMT-JUMPER_2_NO_SILK]  16.48,196.37 270 bottom

## Library data of the parts
3V3_LED 3V3_LED1 3V3_LED2 5V_LED 5V_LED1 5V_LED2 BYP BYP1 BYP2 MEAS MEAS1 MEAS2 VE VE1 VE2 = SparkFun-Jumpers
C1 C3 C19 = SparkFun-Capacitors; PROD_ID: CAP-08280
C2 C7 C11 C16 C21 C25 = SparkFun-Capacitors; PROD_ID: CAP-07822
C4 C6 C20 = SparkFun-Capacitors; PROD_ID: CAP-14106
C5 C10 C12 C13 C15 C18 C22 C24 C27 = SparkFun-Capacitors; PROD_ID: CAP-00810
C8 C17 C26 = SparkFun-Capacitors; PROD_ID: CAP-11330
C9 C14 C23 = SparkFun-Capacitors; PROD_ID: CAP-00868
D1 D6 D12 = SparkFun-DiscreteSemi; PROD_ID: DIO-11284
D2 D4 D11 = SparkFun-LED; PROD_ID: DIO-09003
D3 D7 D8 D10 D13 D15 = SparkFun-LED; PROD_ID: DIO-00819
D5 D9 D14 = SparkFun-DiscreteSemi; PROD_ID: DIO-14072
E$1-E$4 FD1-FD12 LOGO1-LOGO9 U$22 U$24 U$55 U$57 U$88 U$90 = SparkFun-Aesthetics
E$5 E$6 = SparkFun-Retired
F1-F3 = SparkFun-Fuses; PROD_ID: RES-14313
H1 H7 H9-H11 H14-H18 H21-H24 H27 = SparkFun-Hardware
H2-H6 H8 H12 H13 H19 H20 H25 H26 = SparkFun-Hardware; PROD_ID: HW-14899
J1 J15 J27 = SparkFun-MicroMod; PROD_ID: CONN-14877
J2 J12 J25 = SparkFun-Connectors; PROD_ID: CONN-14483
J3 J17 J29 = SparkFun-Connectors; PROD_ID: CONN-14122
J4 J14 J26 = SparkFun-Connectors; PROD_ID: CONN-13694
J5 J9 J11 J13 J18 J19 J23 J24 J30 J31 J35 J36 TP1-TP12 = SparkFun-Connectors
J6 J7 J20 J21 J32 J33 = SparkFun-MicroMod-Function; PROD_ID: CONN-14877
J8 J16 J28 = SparkFun-Connectors; PROD_ID: CONN-11443; SF_ID: PRT-08612
J10 J22 J34 = SparkFun-Connectors; PROD_ID: CONN-16110
Q1-Q3 = SparkFun-DiscreteSemi; PROD_ID: TRANS-11308
R1 R2 R13 R14 R24 R25 = SparkFun-Resistors; PROD_ID: RES-12083
R3 R20 R31 = SparkFun-Resistors; PROD_ID: RES-08296
R4 R6 R7 R17 R21 R22 R28 R32 R33 = SparkFun-Resistors; PROD_ID: RES-00824
R5 R11 R12 R16 R23 R27 = SparkFun-Resistors; PROD_ID: RES-07856
R8 R19 R30 = SparkFun-Resistors; PROD_ID: RES-07857
R9 R15 R26 = SparkFun-Resistors; PROD_ID: RES-07828
R10 R18 R29 = SparkFun-Resistors; PROD_ID: RES-09383
S1 S2 S4 S5 S7 S8 = SparkFun-Switches; PROD_ID: SWCH-14139
S3 S6 S9 = SparkFun-Switches; PROD_ID: SWCH-13215
U1 U2 U4 = SparkFun-IC-Power; PROD_ID: IC-09995
U3 U5 U6 = SparkFun-IC-Power; PROD_ID: VREG-14094
U$1-U$13 U$15 U$16 U$18-U$21 U$23 U$25-U$45 U$47-U$53 U$56 U$58-U$78 U$80-U$86 U$89 U$91-U$99 = top
U$14 U$17 U$46 U$54 U$79 U$87 = SparkFun-MicroMod

## Nets
3.3V [POWER]: C9.1 C10.1 C11.1 C12.1 J1.2 J1.74 J2.2 J4.2 J5.1 J6.73 J7.36 J7.73 J10.4 MEAS.2 MEAS.4 R11.2 TP2.1
3.3V1 [POWER]: C14.1 C15.1 C16.1 C18.1 J12.2 J14.2 J15.2 J15.74 J18.1 J20.73 J21.36 J21.73 J22.4 MEAS1.2 MEAS1.4 R16.2 TP5.1
3.3V2 [POWER]: C23.1 C24.1 C25.1 C27.1 J25.2 J26.2 J27.2 J27.74 J30.1 J32.73 J33.36 J33.73 J34.4 MEAS2.2 MEAS2.4 R27.2 TP9.1
3.3V_EN: J1.4 VE.1
3.3V_EN1: J15.4 VE1.1
3.3V_EN2: J27.4 VE2.1
3.3V_EN_VE: D1.C R9.1 U5.5 VE.2
3.3V_EN_VE1: D6.C R15.1 U3.5 VE1.2
3.3V_EN_VE2: D12.C R26.1 U6.5 VE2.2
!BOOT!: J1.11 S2.3 S2.4
!BOOT!1: J15.11 S5.3 S5.4
!BOOT!2: J27.11 S8.3 S8.4
!CS0!-PROCESSOR: J1.55 J6.49
!CS0!-PROCESSOR1: J15.55 J20.49
!CS0!-PROCESSOR2: J27.55 J32.49
!CS1!-PROCESSOR: J1.70 J7.49
!CS1!-PROCESSOR1: J15.70 J21.49
!CS1!-PROCESSOR2: J27.70 J33.49
!RESET!: J1.6 J5.10 J13.1 S1.3 S1.4
!RESET!1: J15.6 J18.10 J19.1 S4.3 S4.4
!RESET!2: J27.6 J30.10 J31.1 S7.3 S7.4
A0-PROCESSOR: J1.34 J6.38
A0-PROCESSOR1: J15.34 J20.38
A0-PROCESSOR2: J27.34 J32.38
A1-PROCESSOR: J1.38 J7.38
A1-PROCESSOR1: J15.38 J21.38
A1-PROCESSOR2: J27.38 J33.38
CTS1-PROCESSOR: J1.15 J6.16
CTS1-PROCESSOR1: J15.15 J20.16
CTS1-PROCESSOR2: J27.15 J32.16
D0-PROCESSOR: J1.10 J6.47
D0-PROCESSOR1: J15.10 J20.47
D0-PROCESSOR2: J27.10 J32.47
D1-PROCESSOR: J1.18 J7.47
D1-PROCESSOR1: J15.18 J21.47
D1-PROCESSOR2: J27.18 J33.47
D+ [Diff pairs]: J1.3 J3.A6 J3.B6
D+1 [Diff pairs]: J15.3 J17.A6 J17.B6
D+2 [Diff pairs]: J27.3 J29.A6 J29.B6
D- [Diff pairs]: J1.5 J3.A7 J3.B7
D-1 [Diff pairs]: J15.5 J17.A7 J17.B7
D-2 [Diff pairs]: J27.5 J29.A7 J29.B7
G0-PROCESSOR: J1.40 J6.53
G0-PROCESSOR1: J15.40 J20.53
G0-PROCESSOR2: J27.40 J32.53
G1-PROCESSOR: J1.42 J6.55
G1-PROCESSOR1: J15.42 J20.55
G1-PROCESSOR2: J27.42 J32.55
G2-PROCESSOR: J1.44 J6.57
G2-PROCESSOR1: J15.44 J20.57
G2-PROCESSOR2: J27.44 J32.57
G3-PROCESSOR: J1.46 J6.59
G3-PROCESSOR1: J15.46 J20.59
G3-PROCESSOR2: J27.46 J32.59
G4-PROCESSOR/SD_CARD_!CS!: J1.48 J6.61 J10.2
G4-PROCESSOR/SD_CARD_!CS!1: J15.48 J20.61 J22.2
G4-PROCESSOR/SD_CARD_!CS!2: J27.48 J32.61 J34.2
G5-JUMPER: J1.73 J9.2
G5-JUMPER1: J15.73 J23.2
G5-JUMPER2: J27.73 J35.2
G5-PROCESSOR: J7.53 J9.3
G5-PROCESSOR1: J21.53 J23.3
G5-PROCESSOR2: J33.53 J35.3
G6-JUMPER: J1.71 J11.2
G6-JUMPER1: J15.71 J24.2
G6-JUMPER2: J27.71 J36.2
G6-PROCESSOR: J7.55 J11.3
G6-PROCESSOR1: J21.55 J24.3
G6-PROCESSOR2: J33.55 J36.3
G7-PROCESSOR: J1.69 J7.57
G7-PROCESSOR1: J15.69 J21.57
G7-PROCESSOR2: J27.69 J33.57
G8-PROCESSOR: J1.62 J7.59
G8-PROCESSOR1: J15.62 J21.59
G8-PROCESSOR2: J27.62 J33.59
G9-PROCESSOR: J1.60 J7.61
G9-PROCESSOR1: J15.60 J21.61
G9-PROCESSOR2: J27.60 J33.61
GND: 3V3_LED.1 5V_LED.1 C2.2 C3.2 C4.2 C5.2 C8.2 C9.2 C10.2 C11.2 C12.2 D1.A H2.1 H3.1 H4.1 H8.1 J1.1 J1.7 J1.33 J1.36 J1.39 J1.45 J1.75 J2.1 J3.GND J3.GND2 J4.1 J5.3 J5.5 J5.9 J6.1 J6.32 J6.33 J6.34 J6.36 J6.39 J6.45 J6.75 J7.1 J7.32 J7.33 J7.34 J7.39 J7.45 J7.75 J8.1 J10.6 J10.10 J10.11 J10.12 J10.13 R1.1 R2.1 R3.1 R4.1 R6.1 R7.1 S1.1 S1.2 S2.1 S2.2 U2.2 U5.4 U5.EP
GND1: 3V3_LED1.1 5V_LED1.1 C1.2 C6.2 C7.2 C13.2 C14.2 C15.2 C16.2 C17.2 C18.2 D6.A H5.1 H6.1 H12.1 H13.1 J12.1 J14.1 J15.1 J15.7 J15.33 J15.36 J15.39 J15.45 J15.75 J16.1 J17.GND J17.GND2 J18.3 J18.5 J18.9 J20.1 J20.32 J20.33 J20.34 J20.36 J20.39 J20.45 J20.75 J21.1 J21.32 J21.33 J21.34 J21.39 J21.45 J21.75 J22.6 J22.10 J22.11 J22.12 J22.13 R13.1 R14.1 R17.1 R20.1 R21.1 R22.1 S4.1 S4.2 S5.1 S5.2 U1.2 U3.4 U3.EP
GND2: 3V3_LED2.1 5V_LED2.1 C19.2 C20.2 C21.2 C22.2 C23.2 C24.2 C25.2 C26.2 C27.2 D12.A H19.1 H20.1 H25.1 H26.1 J25.1 J26.1 J27.1 J27.7 J27.33 J27.36 J27.39 J27.45 J27.75 J28.1 J29.GND J29.GND2 J30.3 J30.5 J30.9 J32.1 J32.32 J32.33 J32.34 J32.36 J32.39 J32.45 J32.75 J33.1 J33.32 J33.33 J33.34 J33.39 J33.45 J33.75 J34.6 J34.10 J34.11 J34.12 J34.13 R24.1 R25.1 R28.1 R31.1 R32.1 R33.1 S7.1 S7.2 S8.1 S8.2 U4.2 U6.4 U6.EP
HOST_D+ [Diff pairs]: J1.35 J6.35
HOST_D+1 [Diff pairs]: J15.35 J20.35
HOST_D+2 [Diff pairs]: J27.35 J32.35
HOST_D- [Diff pairs]: J1.37 J6.37
HOST_D-1 [Diff pairs]: J15.37 J20.37
HOST_D-2 [Diff pairs]: J27.37 J32.37
I2C_!INT!: J1.16 J6.23 J7.23
I2C_!INT!1: J15.16 J20.23 J21.23
I2C_!INT!2: J27.16 J32.23 J33.23
I2C_SCL: J1.14 J2.4 J4.4 J6.21 J7.21
I2C_SCL1: J12.4 J14.4 J15.14 J20.21 J21.21
I2C_SCL2: J25.4 J26.4 J27.14 J32.21 J33.21
I2C_SDA: J1.12 J2.3 J4.3 J6.19 J7.19
I2C_SDA1: J12.3 J14.3 J15.12 J20.19 J21.19
I2C_SDA2: J25.3 J26.3 J27.12 J32.19 J33.19
N$1: MEAS.1 MEAS.3 U5.1
N$2: 5V_LED.2 D8.C
N$3: D3.A R11.1
N$4: J3.B5 R2.2
N$5: J3.A5 R1.2
N$6: S3.3 S3.4 U2.5
N$7 [POWER]: BYP.1 F2.1 J3.VBUS1 J3.VBUS2
N$8: R3.2 S3.1
N$9: R4.2 S3.2
N$10: 3V3_LED.2 D3.C
N$11: D2.C R12.2
N$12: D8.A R8.1
N$13: R12.1 U1.1
N$14: D4.C R5.2
N$15: R5.1 U2.1
N$16: J17.B5 R14.2
N$17: J17.A5 R13.2
N$18: MEAS1.1 MEAS1.3 U3.1
N$19: D7.A R16.1
N$20 [POWER]: BYP1.1 F1.1 J17.VBUS1 J17.VBUS2
N$21: D10.A R19.1
N$22: 5V_LED1.2 D10.C
N$23: 3V3_LED1.2 D7.C
N$24: S6.3 S6.4 U1.5
N$25: R20.2 S6.1
N$26: R21.2 S6.2
N$27: D11.C R23.2
N$28: R23.1 U4.1
N$29: J29.B5 R25.2
N$30: J29.A5 R24.2
N$31: MEAS2.1 MEAS2.3 U6.1
N$32: D13.A R27.1
N$33 [POWER]: BYP2.1 F3.1 J29.VBUS1 J29.VBUS2
N$34: D15.A R30.1
N$35: 5V_LED2.2 D15.C
N$36: 3V3_LED2.2 D13.C
N$37: S9.3 S9.4 U4.5
N$38: R31.2 S9.1
N$39: R32.2 S9.2
PROCESSOR_CAN-RX: J1.41 J6.43
PROCESSOR_CAN-RX1: J15.41 J20.43
PROCESSOR_CAN-RX2: J27.41 J32.43
PROCESSOR_CAN-TX: J1.43 J6.41
PROCESSOR_CAN-TX1: J15.43 J20.41
PROCESSOR_CAN-TX2: J27.43 J32.41
PWM0-PROCESSOR: J1.32 J6.51
PWM0-PROCESSOR1: J15.32 J20.51
PWM0-PROCESSOR2: J27.32 J32.51
PWM1-PROCESSOR: J1.47 J7.51
PWM1-PROCESSOR1: J15.47 J21.51
PWM1-PROCESSOR2: J27.47 J33.51
PWR_EN0: J1.68 J6.71 J9.1
PWR_EN1: J1.66 J7.71 J11.1
PWR_EN2: J15.68 J20.71 J23.1
PWR_EN3: J15.66 J21.71 J24.1
PWR_EN4: J27.68 J32.71 J35.1
PWR_EN5: J27.66 J33.71 J36.1
RTS1-PROCESSOR: J1.13 J6.18
RTS1-PROCESSOR1: J15.13 J20.18
RTS1-PROCESSOR2: J27.13 J32.18
RX1-PROCESSOR: J1.19 J6.13
RX1-PROCESSOR1: J15.19 J20.13
RX1-PROCESSOR2: J27.19 J32.13
RX2-PROCESSOR: J1.20 J7.13
RX2-PROCESSOR1: J15.20 J21.13
RX2-PROCESSOR2: J27.20 J33.13
SPI_PROCESSOR_SCK: J1.57 J6.3 J7.3 J10.5
SPI_PROCESSOR_SCK1: J15.57 J20.3 J21.3 J22.5
SPI_PROCESSOR_SCK2: J27.57 J32.3 J33.3 J34.5
SPI_PROCESSOR_SDI: J1.61 J6.7 J7.7 J10.7
SPI_PROCESSOR_SDI1: J15.61 J20.7 J21.7 J22.7
SPI_PROCESSOR_SDI2: J27.61 J32.7 J33.7 J34.7
SPI_PROCESSOR_SDO: J1.59 J6.5 J7.5 J10.3
SPI_PROCESSOR_SDO1: J15.59 J20.5 J21.5 J22.3
SPI_PROCESSOR_SDO2: J27.59 J32.5 J33.5 J34.3
SWDCK: J1.21 J5.4
SWDCK1: J15.21 J18.4
SWDCK2: J27.21 J30.4
SWDIO: J1.23 J5.2 TP1.1
SWDIO1: J15.23 J18.2 TP8.1
SWDIO2: J27.23 J30.2 TP12.1
TX1-PROCESSOR: J1.17 J6.15
TX1-PROCESSOR1: J15.17 J20.15
TX1-PROCESSOR2: J27.17 J32.15
TX2-PROCESSOR: J1.22 J7.15
TX2-PROCESSOR1: J15.22 J21.15
TX2-PROCESSOR2: J27.22 J33.15
V_BATT [POWER]: C4.1 J8.2 Q1.3 TP3.1 U2.3
V_BATT1 [POWER]: C6.1 J16.2 Q2.3 TP6.1 U1.3
V_BATT2 [POWER]: C20.1 J28.2 Q3.3 TP10.1 U4.3
VCC: C2.1 C3.1 C5.1 C8.1 D4.A D5.C J6.72 J6.74 J7.72 J7.74 Q1.2 R9.2 U2.4 U5.8
VCC1: C1.1 C7.1 C13.1 C17.1 D2.A D9.C J20.72 J20.74 J21.72 J21.74 Q2.2 R15.2 U1.4 U3.8
VCC2: C19.1 C21.1 C22.1 C26.1 D11.A D14.C J32.72 J32.74 J33.72 J33.74 Q3.2 R26.2 U4.4 U6.8
VIN: BYP.2 D5.A F2.2 J1.9 Q1.1 R6.2 R8.2 R10.2 TP4.1
VIN1: BYP1.2 D9.A F1.2 J15.9 Q2.1 R18.2 R19.2 R22.2 TP7.1
VIN2: BYP2.2 D14.A F3.2 J27.9 Q3.1 R29.2 R30.2 R33.2 TP11.1
VIN/1: J15.49 R17.2 R18.1
VIN/2: J27.49 R28.2 R29.1
VIN/3: J1.49 R7.2 R10.1

## Tracks (layer width: path | path; a pad name or v marks a point on that pad's centre or on a via)
3.3V  (via drill 0.3, 0.35)  (8 unrouted)
  Top 0.203: v105.16,78.99 105.16,77.22 106.43,75.95 106.43,74.68 106.3,74.55 106.3,73.46 106.94,72.82 J7.36 | v14.22,73.15 12.95,73.15 11.94,72.14 11.94,70.1 10.67,68.84 J5.1 | R11.2 14.05,44.22 MEAS.4
  Top 0.559: v55.88,78.99 29.49,78.99 23.57,73.08 v23.19,73.08 23.06,72.95 v23.06,54.1 | v17.53,52.32 17.51,52.31 C11.1 | v44.96,40.14 44.96,26.71 44.48,26.23 J2.2 44.46,22.6 44.46,20.45 | C12.1 31.24,27.75 31.24,26.28 J10.4 31.21,22.77 33.53,20.45 44.46,20.45 | J4.2 44.46,20.45
  Bottom 0.203: v23.19,73.08 23.11,73.15 v14.22,73.15 | TP2.1 11.95,66.28 10.6,67.63 J5.1
  Bottom 0.559: v44.96,40.14 44.96,52.91 v44.96,54.1 v26.42,54.1 v23.06,54.1 19.3,54.1 v17.53,52.32 | v55.88,78.99 77.67,78.99 | 77.67,78.99 v77.67,77.45 | v116.28,77.5 116.28,77.98 115.32,78.94 115.32,78.99 v105.16,78.99 77.67,78.99
  pour Top (isolate 0.305, no thermals): 16.74,43.28 16.74,50.73 18.62,50.73 18.62,43.28
  pour Top (isolate 0.305, no thermals): 44.7,56.34 44.7,53.62 45.69,53.62 45.69,54.31 45.14,54.86 45.14,56.34
  pour Top (isolate 0.305, no thermals): 26.92,56.39 26.42,56.39 26.42,54.86 26.16,54.61 26.16,53.59 26.92,53.59
  pour Top (no thermals): 77.7,79.48 77.98,79.48 77.98,77.17 77.47,77.17 77.47,77.93 77.7,77.93
  pour Top (no thermals): 116.08,79.22 116.33,79.22 116.33,77.77 116.51,77.77 116.51,77.19 115.95,77.19 115.95,77.77 116.08,77.77
3.3V1  (via drill 0.3, 0.35)  (8 unrouted)
  Top 0.203: v105.16,156.72 105.16,154.94 106.43,153.67 106.43,152.41 106.3,152.28 106.3,151.19 106.94,150.54 J21.36 | v14.22,150.88 12.95,150.88 11.94,149.86 11.94,147.83 10.67,146.56 J18.1 | R16.2 14.05,121.95 MEAS1.4
  Top 0.559: v55.88,156.72 29.49,156.72 23.57,150.8 v23.19,150.8 23.06,150.67 v23.06,131.83 | v17.53,130.05 17.51,130.03 C16.1 | v44.96,117.86 44.96,104.43 44.48,103.96 J12.2 44.46,100.32 44.46,98.17 | C18.1 31.24,105.47 31.24,104.01 J22.4 31.21,100.49 33.53,98.17 44.46,98.17 | J14.2 44.46,98.17
  Bottom 0.203: v23.19,150.8 23.11,150.88 v14.22,150.88 | TP5.1 11.95,144.01 10.6,145.35 J18.1
  Bottom 0.559: v44.96,117.86 44.96,130.63 v44.96,131.83 v26.42,131.83 v23.06,131.83 19.3,131.83 v17.53,130.05 | v55.88,156.72 77.67,156.72 | 77.67,156.72 v77.67,155.17 | v116.28,155.22 116.28,155.7 115.32,156.67 115.32,156.72 v105.16,156.72 77.67,156.72
  pour Top (isolate 0.305, no thermals): 16.74,121.01 16.74,128.45 18.62,128.45 18.62,121.01
  pour Top (isolate 0.305, no thermals): 44.7,134.06 44.7,131.34 45.69,131.34 45.69,132.03 45.14,132.59 45.14,134.06
  pour Top (isolate 0.305, no thermals): 26.92,134.11 26.42,134.11 26.42,132.59 26.16,132.33 26.16,131.32 26.92,131.32
  pour Top (no thermals): 77.7,157.2 77.98,157.2 77.98,154.89 77.47,154.89 77.47,155.65 77.7,155.65
  pour Top (no thermals): 116.08,156.95 116.33,156.95 116.33,155.5 116.51,155.5 116.51,154.91 115.95,154.91 115.95,155.5 116.08,155.5
3.3V2  (via drill 0.3, 0.35)  (8 unrouted)
  Top 0.203: v105.16,234.44 105.16,232.66 106.43,231.39 106.43,230.13 106.3,230 106.3,228.91 106.94,228.27 J33.36 | v14.22,228.6 12.95,228.6 11.94,227.58 11.94,225.55 10.67,224.29 J30.1 | R27.2 14.05,199.67 MEAS2.4
  Top 0.559: v55.88,234.44 29.49,234.44 23.57,228.52 v23.19,228.52 23.06,228.4 v23.06,209.55 | v17.53,207.77 17.51,207.76 C25.1 | v44.96,195.58 44.96,182.16 44.48,181.68 J25.2 44.46,178.04 44.46,175.89 | C27.1 31.24,183.2 31.24,181.73 J34.4 31.21,178.21 33.53,175.89 44.46,175.89 | J26.2 44.46,175.89
  Bottom 0.203: v23.19,228.52 23.11,228.6 v14.22,228.6 | TP9.1 11.95,221.73 10.6,223.08 J30.1
  Bottom 0.559: v44.96,195.58 44.96,208.36 v44.96,209.55 v26.42,209.55 v23.06,209.55 19.3,209.55 v17.53,207.77 | v55.88,234.44 77.67,234.44 | 77.67,234.44 v77.67,232.89 | v116.28,232.94 116.28,233.43 115.32,234.39 115.32,234.44 v105.16,234.44 77.67,234.44
  pour Top (isolate 0.305, no thermals): 16.74,198.73 16.74,206.18 18.62,206.18 18.62,198.73
  pour Top (isolate 0.305, no thermals): 44.7,211.79 44.7,209.07 45.69,209.07 45.69,209.75 45.14,210.31 45.14,211.79
  pour Top (isolate 0.305, no thermals): 26.92,211.84 26.42,211.84 26.42,210.31 26.16,210.06 26.16,209.04 26.92,209.04
  pour Top (no thermals): 77.7,234.92 77.98,234.92 77.98,232.61 77.47,232.61 77.47,233.38 77.7,233.38
  pour Top (no thermals): 116.08,234.67 116.33,234.67 116.33,233.22 116.51,233.22 116.51,232.64 115.95,232.64 115.95,233.22 116.08,233.22
3.3V_EN  (via drill 0.3)
  Top 0.203: J1.4 27.31,52.97 26.16,51.82 26.16,44.96 25.65,44.45 v25.53,44.45
  Bottom 0.203: v25.53,44.45 24,42.93 19.56,42.93 17.96,41.33 VE.1
3.3V_EN1  (via drill 0.3)
  Top 0.203: J15.4 27.31,130.69 26.16,129.54 26.16,122.68 25.65,122.17 v25.53,122.17
  Bottom 0.203: v25.53,122.17 24,120.65 19.56,120.65 17.96,119.05 VE1.1
3.3V_EN2  (via drill 0.3)
  Top 0.203: J27.4 27.31,208.42 26.16,207.26 26.16,200.41 25.65,199.9 v25.53,199.9
  Bottom 0.203: v25.53,199.9 24,198.37 19.56,198.37 17.96,196.77 VE2.1
3.3V_EN_VE  (via drill 0.3)
  Top 0.203: D1.C 14.58,40.49 v14.61,40.51
  Top 0.254: U5.5 18.68,38.38 | 18.68,38.38 18.68,37.49 R9.1 | D1.C 16.75,39.77 18.14,38.38 18.68,38.38
  Bottom 0.203: v14.61,40.51 VE.2
3.3V_EN_VE1  (via drill 0.3)
  Top 0.203: D6.C 14.58,118.21 v14.61,118.24
  Top 0.254: U3.5 18.68,116.1 | 18.68,116.1 18.68,115.21 R15.1 | D6.C 16.75,117.49 18.14,116.1 18.68,116.1
  Bottom 0.203: v14.61,118.24 VE1.2
3.3V_EN_VE2  (via drill 0.3)
  Top 0.203: D12.C 14.58,195.94 v14.61,195.96
  Top 0.254: U6.5 18.68,193.83 | 18.68,193.83 18.68,192.94 R26.1 | D12.C 16.75,195.22 18.14,193.83 18.68,193.83
  Bottom 0.203: v14.61,195.96 VE2.2
!BOOT!  (via drill 0.3)
  Top 0.203: S2.4 S2.3 15.11,55.5 v15.24,55.63 | J1.11 29.08,63.17 29.08,61.47 v28.93,61.32
  Bottom 0.203: v15.24,55.63 19.02,59.41 27.03,59.41 v28.93,61.32
!BOOT!1  (via drill 0.3)
  Top 0.203: S5.4 S5.3 15.11,133.22 v15.24,133.35 | J15.11 29.08,140.89 29.08,139.19 v28.93,139.04
  Bottom 0.203: v15.24,133.35 19.02,137.13 27.03,137.13 v28.93,139.04
!BOOT!2  (via drill 0.3)
  Top 0.203: S8.4 S8.3 15.11,210.95 v15.24,211.07 | J27.11 29.08,218.62 29.08,216.92 v28.93,216.76
  Bottom 0.203: v15.24,211.07 19.02,214.86 27.03,214.86 v28.93,216.76
!CS0!-PROCESSOR  (via drill 0.3)
  Top 0.203: v71.88,75.44 71.88,75.03 74.07,72.85 78.41,72.85 79.76,71.5 79.76,68.43 78.99,67.67 72.75,67.67 69.83,64.75 40.44,64.75 40.06,64.37 J1.55 | v71.88,76.96 71.88,78.89 J6.49
  Bottom 0.203: v71.88,76.96 71.86,76.94 71.86,75.46 v71.88,75.44
!CS0!-PROCESSOR1  (via drill 0.3)
  Top 0.203: v71.88,153.16 71.88,152.76 74.07,150.57 78.41,150.57 79.76,149.22 79.76,146.15 78.99,145.39 72.75,145.39 69.83,142.47 40.44,142.47 40.06,142.1 J15.55 | v71.88,154.69 71.88,156.61 J20.49
  Bottom 0.203: v71.88,154.69 71.86,154.66 71.86,153.19 v71.88,153.16
!CS0!-PROCESSOR2  (via drill 0.3)
  Top 0.203: v71.88,230.89 71.88,230.48 74.07,228.29 78.41,228.29 79.76,226.95 79.76,223.88 78.99,223.11 72.75,223.11 69.83,220.19 40.44,220.19 40.06,219.82 J27.55 | v71.88,232.41 71.88,234.34 J32.49
  Bottom 0.203: v71.88,232.41 71.86,232.38 71.86,230.91 v71.88,230.89
!CS1!-PROCESSOR  (via drill 0.3)
  Top 0.203: J1.70 43.81,53.85 44.91,52.76 60.3,52.76 v69.42,61.87 | v79.1,51.92 79.6,51.41 85.9,51.41 96.59,62.1 117.24,62.1 123.09,67.95 123.09,80.52 121.61,81.99 111.71,81.99 110.19,80.47 J7.49
  Bottom 0.203: v69.42,61.87 79.1,52.2 v79.1,51.92
!CS1!-PROCESSOR1  (via drill 0.3)
  Top 0.203: J15.70 43.81,131.57 44.91,130.48 60.3,130.48 v69.42,139.6 | v79.1,129.64 79.6,129.13 85.9,129.13 96.59,139.83 117.24,139.83 123.09,145.67 123.09,158.24 121.61,159.71 111.71,159.71 110.19,158.2 J21.49
  Bottom 0.203: v69.42,139.6 79.1,129.92 v79.1,129.64
!CS1!-PROCESSOR2  (via drill 0.3)
  Top 0.203: J27.70 43.81,209.3 44.91,208.2 60.3,208.2 v69.42,217.32 | v79.1,207.37 79.6,206.86 85.9,206.86 96.59,217.55 117.24,217.55 123.09,223.39 123.09,235.96 121.61,237.44 111.71,237.44 110.19,235.92 J33.49
  Bottom 0.203: v69.42,217.32 79.1,207.64 v79.1,207.37
!RESET!  (via drill 0.3)
  Top 0.203: S1.4 10.92,62.23 | 10.92,62.23 S1.3 14.22,62.23 13.97,61.98 v13.97,59.94 | 10.92,62.23 10.97,62.28 J13.1 9.35,65.79 8.23,65.79 7.37,66.65 7.37,72.59 8.7,73.92 J5.10 | v24.99,59.94 26.67,59.94 27.81,58.8 J1.6
  Bottom 0.203: v24.99,59.94 v13.97,59.94
!RESET!1  (via drill 0.3)
  Top 0.203: S4.4 10.92,139.95 | 10.92,139.95 S4.3 14.22,139.95 13.97,139.7 v13.97,137.67 | 10.92,139.95 10.97,140 J19.1 9.35,143.51 8.23,143.51 7.37,144.37 7.37,150.31 8.7,151.64 J18.10 | v24.99,137.67 26.67,137.67 27.81,136.52 J15.6
  Bottom 0.203: v24.99,137.67 v13.97,137.67
!RESET!2  (via drill 0.3)
  Top 0.203: S7.4 10.92,217.68 | 10.92,217.68 S7.3 14.22,217.68 13.97,217.42 v13.97,215.39 | 10.92,217.68 10.97,217.73 J31.1 9.35,221.23 8.23,221.23 7.37,222.1 7.37,228.03 8.7,229.37 J30.10 | v24.99,215.39 26.67,215.39 27.81,214.25 J27.6
  Bottom 0.203: v24.99,215.39 v13.97,215.39
A0-PROCESSOR
  Top 0.203: J1.34 34.81,54.3 35.31,53.8 35.31,48.33 37.54,46.1 64.72,46.1 84.79,66.17 84.79,73.71 82.45,76.05 71.22,76.05 69.09,73.91 J6.38
A0-PROCESSOR1
  Top 0.203: J15.34 34.81,132.03 35.31,131.53 35.31,126.05 37.54,123.82 64.72,123.82 84.79,143.89 84.79,151.43 82.45,153.77 71.22,153.77 69.09,151.64 J20.38
A0-PROCESSOR2
  Top 0.203: J27.34 34.81,209.75 35.31,209.25 35.31,203.77 37.54,201.55 64.72,201.55 84.79,221.62 84.79,229.16 82.45,231.5 71.22,231.5 69.09,229.36 J32.38
A1-PROCESSOR  (via drill 0.3)
  Top 0.203: J1.38 35.81,48.79 37.83,46.77 63.98,46.77 84.12,66.91 v84.12,66.94 | J7.38 107.44,68.83 105.41,66.8 93.62,66.8 v88.82,62
  Bottom 0.203: v88.82,62 88.82,62.23 v84.12,66.94
A1-PROCESSOR1  (via drill 0.3)
  Top 0.203: J15.38 35.81,126.51 37.83,124.49 63.98,124.49 84.12,144.63 v84.12,144.66 | J21.38 107.44,146.56 105.41,144.53 93.62,144.53 v88.82,139.72
  Bottom 0.203: v88.82,139.72 88.82,139.95 v84.12,144.66
A1-PROCESSOR2  (via drill 0.3)
  Top 0.203: J27.38 35.81,204.24 37.83,202.22 63.98,202.22 84.12,222.36 v84.12,222.38 | J33.38 107.44,224.28 105.41,222.25 93.62,222.25 v88.82,217.45
  Bottom 0.203: v88.82,217.45 88.82,217.68 v84.12,222.38
CTS1-PROCESSOR  (via drill 0.3)
  Top 0.203: J1.15 30.06,68.56 v29.97,68.66 | v35.74,68.25 62.15,68.25 63.58,69.67 63.58,71.37 J6.16
  Bottom 0.203: v35.74,68.25 30.38,68.25 v29.97,68.66
CTS1-PROCESSOR1  (via drill 0.3)
  Top 0.203: J15.15 30.06,146.29 v29.97,146.38 | v35.74,145.97 62.15,145.97 63.58,147.4 63.58,149.1 J20.16
  Bottom 0.203: v35.74,145.97 30.38,145.97 v29.97,146.38
CTS1-PROCESSOR2  (via drill 0.3)
  Top 0.203: J27.15 30.06,224.01 v29.97,224.1 | v35.74,223.7 62.15,223.7 63.58,225.12 63.58,226.82 J32.16
  Bottom 0.203: v35.74,223.7 30.38,223.7 v29.97,224.1
D0-PROCESSOR  (via drill 0.3)
  Top 0.203: J1.10 28.81,53.78 26.67,51.64 26.67,47.88 27.74,46.81 v27.74,46.79 | v34.16,43.18 34.24,43.1 68.28,43.1 81.53,56.36 v81.53,56.39 | v71.12,67.06 72.24,68.17 78.72,68.17 78.99,68.45 78.99,71.78 78.28,72.49 73.74,72.49 v71.37,74.85 | v71.32,77.57 71.34,77.59 J6.47
  Bottom 0.203: v81.53,56.39 71.12,66.8 v71.12,67.06 | v71.32,77.57 71.32,74.91 v71.37,74.85 | v34.16,43.18 34.16,43.1 33.15,42.09 32.44,42.09 v27.74,46.79
D0-PROCESSOR1  (via drill 0.3)
  Top 0.203: J15.10 28.81,131.51 26.67,129.36 26.67,125.6 27.74,124.54 v27.74,124.51 | v34.16,120.9 34.24,120.83 68.28,120.83 81.53,134.09 v81.53,134.11 | v71.12,144.78 72.24,145.9 78.72,145.9 78.99,146.18 78.99,149.5 78.28,150.22 73.74,150.22 v71.37,152.58 | v71.32,155.3 71.34,155.31 J20.47
  Bottom 0.203: v81.53,134.11 71.12,144.53 v71.12,144.78 | v71.32,155.3 71.32,152.63 v71.37,152.58 | v34.16,120.9 34.16,120.83 33.15,119.81 32.44,119.81 v27.74,124.51
D0-PROCESSOR2  (via drill 0.3)
  Top 0.203: J27.10 28.81,209.23 26.67,207.09 26.67,203.33 27.74,202.26 v27.74,202.23 | v34.16,198.63 34.24,198.55 68.28,198.55 81.53,211.81 v81.53,211.84 | v71.12,222.5 72.24,223.62 78.72,223.62 78.99,223.9 78.99,227.23 78.28,227.94 73.74,227.94 v71.37,230.3 | v71.32,233.02 v71.34,233.03 J32.47
  Bottom 0.203: v81.53,211.84 71.12,222.25 v71.12,222.5 | v71.32,233.02 71.32,230.35 v71.37,230.3 | v34.16,198.63 34.16,198.55 33.15,197.54 32.44,197.54 v27.74,202.23
D1-PROCESSOR  (via drill 0.3)
  Top 0.203: J1.18 30.81,51.39 v29.97,50.55 | v33.27,47.24 35.48,45.03 66.27,45.03 87.63,66.4 87.63,70.1 92.05,74.52 102.72,74.52 103.68,73.56 v103.91,73.56 | v107.7,75.44 109.02,75.44 109.69,76.11 J7.47
  Bottom 0.203: v29.97,50.55 v33.27,47.24 | v103.91,73.56 107.09,73.56 107.7,74.17 v107.7,75.44
D1-PROCESSOR1  (via drill 0.3)
  Top 0.203: J15.18 30.81,129.11 v29.97,128.27 | v33.27,124.97 35.48,122.76 66.27,122.76 87.63,144.12 87.63,147.83 92.05,152.25 102.72,152.25 103.68,151.28 v103.91,151.28 | v107.7,153.16 109.02,153.16 109.69,153.84 J21.47
  Bottom 0.203: v29.97,128.27 v33.27,124.97 | v103.91,151.28 107.09,151.28 107.7,151.89 v107.7,153.16
D1-PROCESSOR2  (via drill 0.3)
  Top 0.203: J27.18 30.81,206.84 v29.97,205.99 | v33.27,202.69 35.48,200.48 66.27,200.48 87.63,221.84 87.63,225.55 92.05,229.97 102.72,229.97 103.68,229.01 v103.91,229.01 | v107.7,230.89 109.02,230.89 109.69,231.56 J33.47
  Bottom 0.203: v29.97,205.99 v33.27,202.69 | v103.91,229.01 107.09,229.01 107.7,229.62 v107.7,230.89
D+
  Top 0.203: J1.3 27.06,61.43 28.96,59.54 30.88,59.54 32.69,57.73 32.69,50.22 25.99,43.51 25.99,28.41 24.71,27.13 24.16,27.13 22.71,25.67 22.71,24.41 22.11,23.8 18.14,19.83 18.14,18.29 17.77,17.92 J3.B6 17.78,16.82 17.78,16 17.53,15.75 17.02,15.75 16.77,16 J3.A6
D+1
  Top 0.203: J15.3 27.06,139.16 28.96,137.26 30.88,137.26 32.69,135.45 32.69,127.94 25.99,121.24 25.99,106.13 24.71,104.85 24.16,104.85 22.71,103.4 22.71,102.13 22.11,101.52 18.14,97.55 18.14,96.01 17.77,95.64 J17.B6 17.78,94.54 17.78,93.73 17.53,93.47 17.02,93.47 16.77,93.72 J17.A6
D+2
  Top 0.203: J27.3 27.06,216.88 28.96,214.99 30.88,214.99 32.69,213.18 32.69,205.67 25.99,198.96 25.99,183.85 24.71,182.57 24.16,182.57 22.71,181.12 22.71,179.85 22.11,179.25 18.14,175.28 18.14,173.74 17.77,173.37 J29.B6 17.78,172.27 17.78,171.45 17.53,171.2 17.02,171.2 16.77,171.45 J29.A6
D-  (via drill 0.3)
  Top 0.203: v27.18,60.45 27.53,60.45 28.8,59.18 30.73,59.18 32.36,57.56 32.36,50.39 25.65,43.69 25.65,28.54 24.57,27.46 24.03,27.46 22.29,25.72 22.29,24.45 17.8,19.96 17.8,18.62 17.27,18.08 17.27,17.78 | v28.04,61.27 27.58,61.72 27.58,63.17 J1.5 | J3.A7 17.27,17.78 | J3.B7 16.39,16.95 16.39,17.43 16.74,17.78 17.27,17.78
  Bottom 0.203: v28.04,61.27 27.23,60.45 v27.18,60.45
D-1  (via drill 0.3)
  Top 0.203: v27.18,138.18 27.53,138.18 28.8,136.91 30.73,136.91 32.36,135.28 32.36,128.11 25.65,121.41 25.65,106.27 24.57,105.18 24.03,105.18 22.29,103.44 22.29,102.17 17.8,97.69 17.8,96.34 17.27,95.81 17.27,95.5 | v28.04,138.99 27.58,139.45 27.58,140.89 J15.5 | J17.A7 17.27,95.5 | J17.B7 16.39,94.68 16.39,95.15 16.74,95.5 17.27,95.5
  Bottom 0.203: v28.04,138.99 27.23,138.18 v27.18,138.18
D-2  (via drill 0.3)
  Top 0.203: v27.18,215.9 27.53,215.9 28.8,214.63 30.73,214.63 32.36,213 32.36,205.84 25.65,199.13 25.65,183.99 24.57,182.91 24.03,182.91 22.29,181.16 22.29,179.9 17.8,175.41 17.8,174.07 17.27,173.53 17.27,173.23 | v28.04,216.71 27.58,217.17 27.58,218.61 J27.5 | J29.A7 17.27,173.23 | J29.B7 16.39,172.4 16.39,172.87 16.74,173.23 17.27,173.23
  Bottom 0.203: v28.04,216.71 27.23,215.9 v27.18,215.9
G0-PROCESSOR  (via drill 0.3)
  Top 0.203: v74.17,75.44 74.37,75.44 74.62,75.69 82.04,75.69 83.79,73.94 83.79,67.67 63.39,47.28 38.54,47.28 36.31,49.5 36.32,49.51 J1.40 | v73.91,76.94 73.81,77.04 73.05,77.04 72.81,77.28 72.81,78.91 J6.53
  Bottom 0.203: v73.91,76.94 73.91,75.69 v74.17,75.44
G0-PROCESSOR1  (via drill 0.3)
  Top 0.203: v74.17,153.16 74.37,153.16 74.62,153.42 82.04,153.42 83.79,151.66 83.79,145.4 63.39,125 38.54,125 36.31,127.23 36.32,127.24 36.32,133.35 J15.40 | v73.91,154.66 73.81,154.76 73.05,154.76 72.81,155 72.81,156.63 J20.53
  Bottom 0.203: v73.91,154.66 73.91,153.42 v74.17,153.16
G0-PROCESSOR2  (via drill 0.3)
  Top 0.203: v74.17,230.89 74.37,230.89 74.62,231.14 82.04,231.14 83.79,229.39 83.79,223.12 63.39,202.72 38.54,202.72 36.31,204.95 36.32,204.96 J27.40 | v73.91,232.38 73.81,232.49 73.05,232.49 72.81,232.72 72.81,234.36 J32.53
  Bottom 0.203: v73.91,232.38 73.91,231.14 v74.17,230.89
G1-PROCESSOR  (via drill 0.3)
  Top 0.203: v73.66,74.91 74.45,74.91 74.91,75.36 81.54,75.36 83.29,73.61 83.29,68.19 62.88,47.78 39.26,47.78 36.85,50.18 36.85,55.6 J1.42 | v73.41,77.55 73.34,77.55 J6.55
  Bottom 0.203: v73.41,77.55 73.41,75.16 v73.66,74.91
G1-PROCESSOR1  (via drill 0.3)
  Top 0.203: v73.66,152.63 74.45,152.63 74.91,153.09 81.54,153.09 83.29,151.33 83.29,145.91 62.88,125.5 39.26,125.5 36.85,127.9 36.85,133.32 J15.42 | v73.41,155.27 73.34,155.27 J20.55
  Bottom 0.203: v73.41,155.27 73.41,152.88 v73.66,152.63
G1-PROCESSOR2  (via drill 0.3)
  Top 0.203: v73.66,230.35 74.45,230.35 74.91,230.81 81.54,230.81 83.29,229.06 83.29,223.63 62.88,203.22 39.26,203.22 36.85,205.62 36.85,211.04 J27.42 | v73.41,232.99 73.34,232.99 J32.55
  Bottom 0.203: v73.41,232.99 73.41,230.61 v73.66,230.35
G2-PROCESSOR  (via drill 0.3)
  Top 0.203: J6.57 73.84,77.98 74.68,77.14 v74.68,76.96 | v74.68,74.42 75.18,74.93 81.15,74.93 82.66,73.42 82.66,68.34 62.64,48.33 40,48.33 37.31,51.01 J1.44
  Bottom 0.203: v74.68,74.42 v74.68,76.96
G2-PROCESSOR1  (via drill 0.3)
  Top 0.203: J20.57 73.84,155.7 74.68,154.86 v74.68,154.69 | v74.68,152.15 75.18,152.65 81.15,152.65 82.66,151.15 82.66,146.07 62.64,126.05 40,126.05 37.31,128.73 J15.44
  Bottom 0.203: v74.68,152.15 v74.68,154.69
G2-PROCESSOR2  (via drill 0.3)
  Top 0.203: J32.57 73.84,233.43 74.68,232.59 v74.68,232.41 | v74.68,229.87 75.18,230.38 81.15,230.38 82.66,228.87 82.66,223.79 62.64,203.77 40,203.77 37.31,206.46 J27.44
  Bottom 0.203: v74.68,229.87 v74.68,232.41
G3-PROCESSOR  (via drill 0.3)
  Top 0.203: v84.23,76.53 84.23,78.44 82.22,80.44 74.85,80.44 74.34,79.93 J6.59 | v81.61,73.71 81.61,68.2 62.28,48.88 40.33,48.88 37.81,51.4 J1.46
  Bottom 0.203: v81.61,73.71 81.61,73.91 v84.23,76.53
G3-PROCESSOR1  (via drill 0.3)
  Top 0.203: v84.23,154.25 84.23,156.16 82.22,158.17 74.85,158.17 74.34,157.65 J20.59 | v81.61,151.43 81.61,145.92 62.28,126.6 40.33,126.6 37.81,129.12 J15.46
  Bottom 0.203: v81.61,151.43 81.61,151.64 v84.23,154.25
G3-PROCESSOR2  (via drill 0.3)
  Top 0.203: v84.23,231.98 84.23,233.88 82.22,235.89 74.85,235.89 74.34,235.37 J32.59 | v81.61,229.16 81.61,223.65 62.28,204.33 40.33,204.33 37.81,206.84 J27.46
  Bottom 0.203: v81.61,229.16 81.61,229.36 v84.23,231.98
G4-PROCESSOR/SD_CARD_!CS!  (via drill 0.3)